# Altium PCB PCB_Class.PcbDoc
Units mil, origin at the board's own origin, x right, y up, seen from the top; angles counter-clockwise.
Board outline 2362.2 x 2677.17 mil, 2 copper layers (Top Layer, Bottom Layer), stack 57.918 mil thick; 54 components, 39 nets, 178 pads, 24 vias.
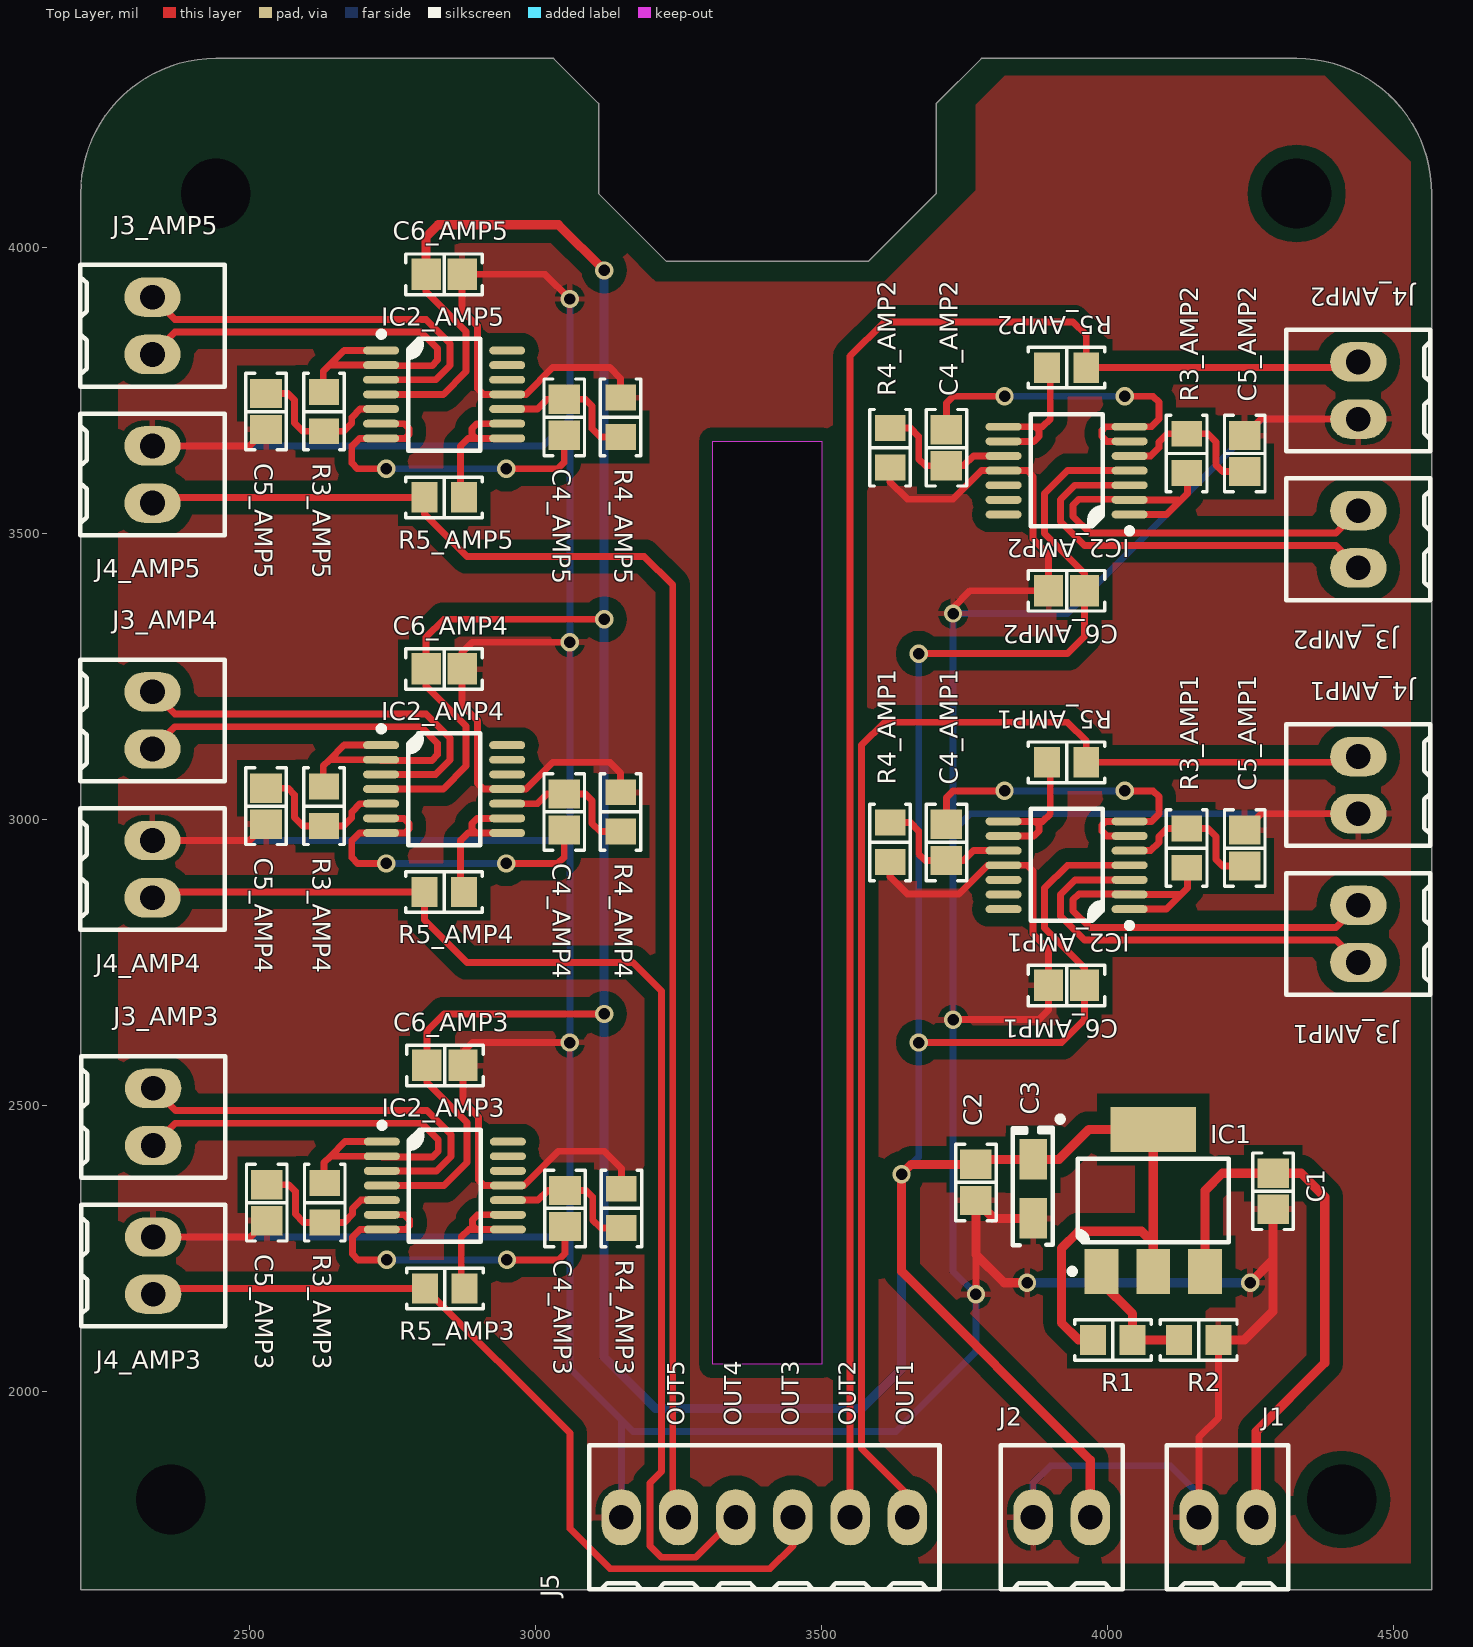
[diagram p0: Top Layer view]
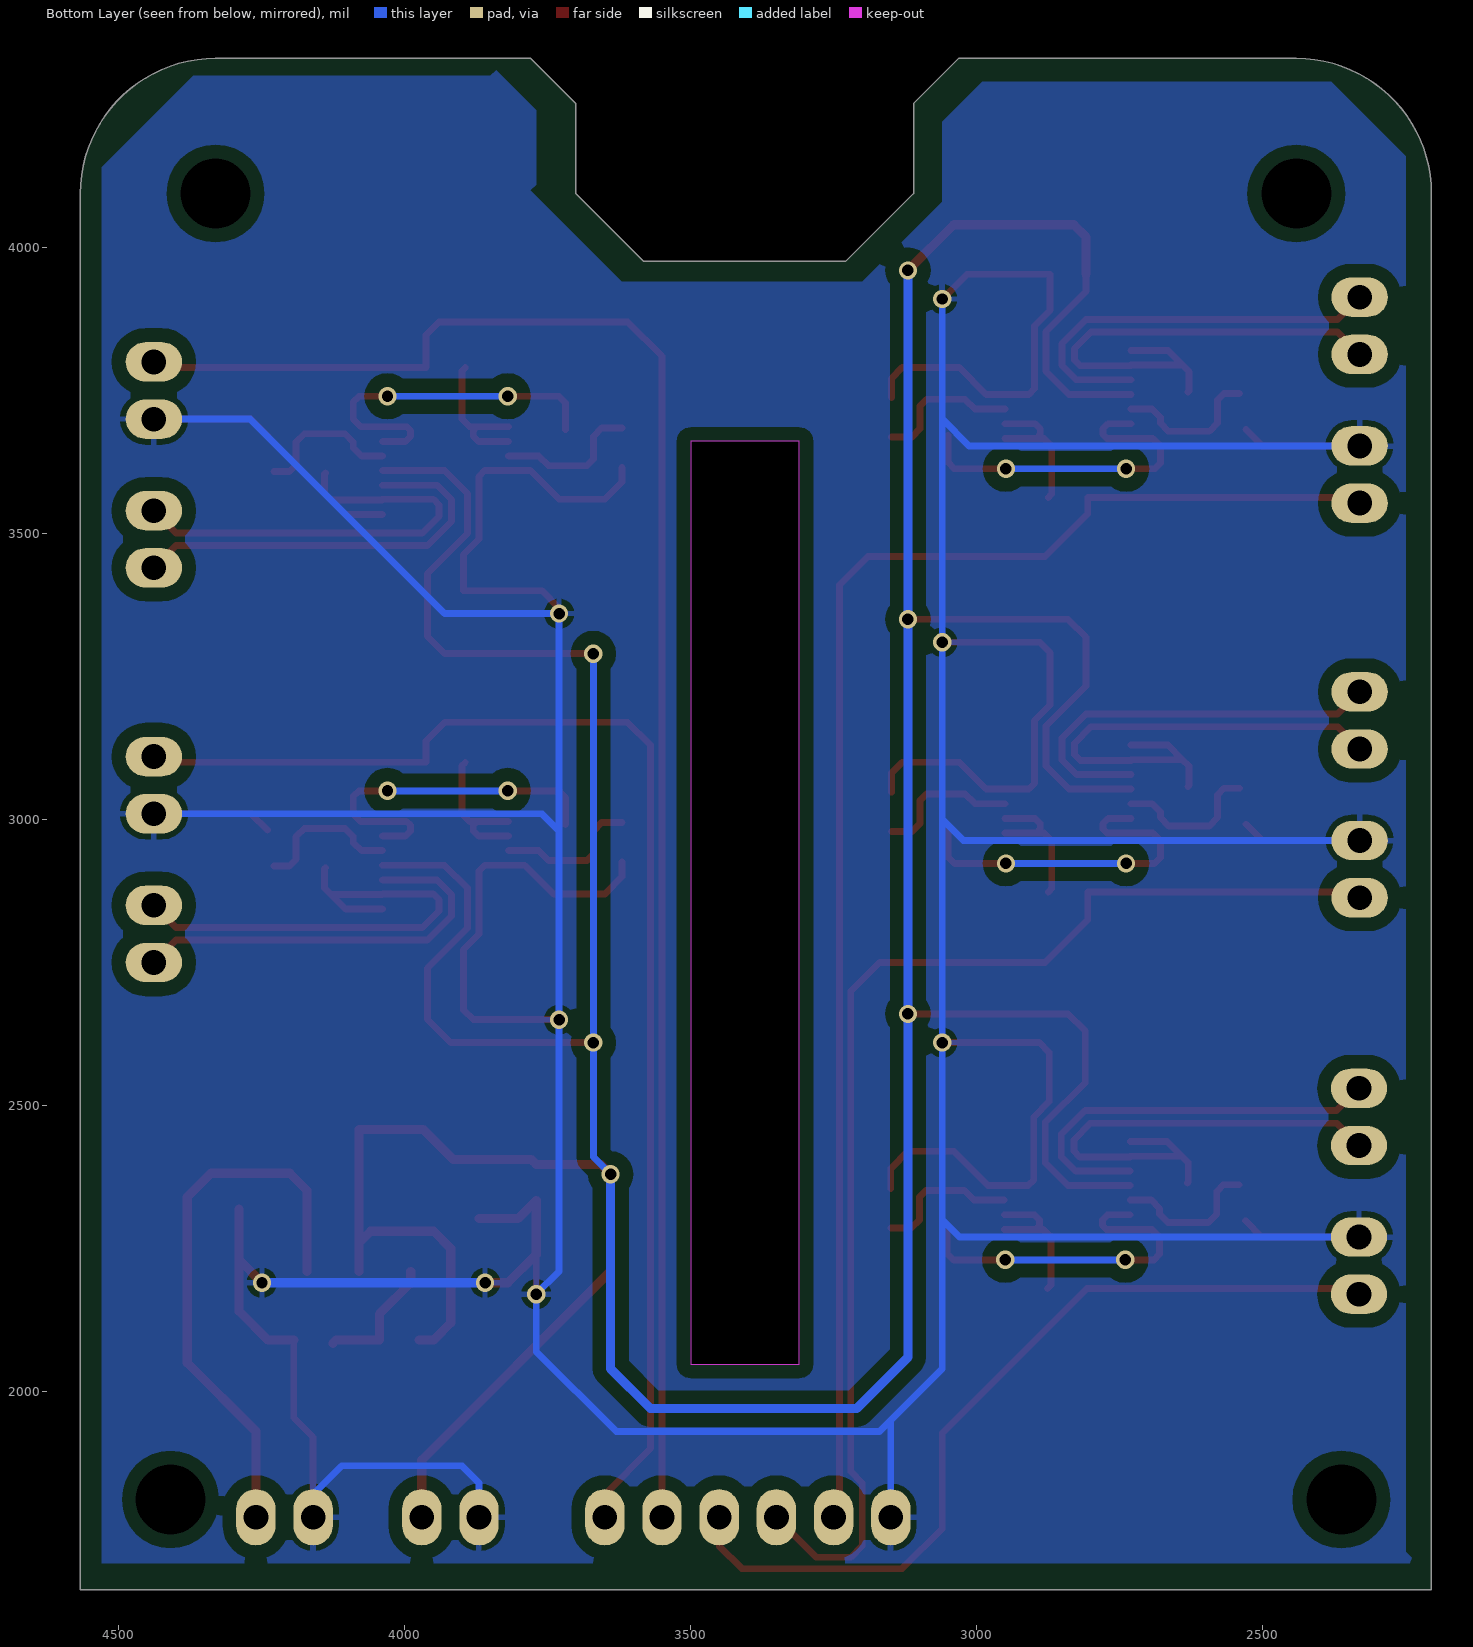
[diagram p1: Bottom Layer view, seen from below]
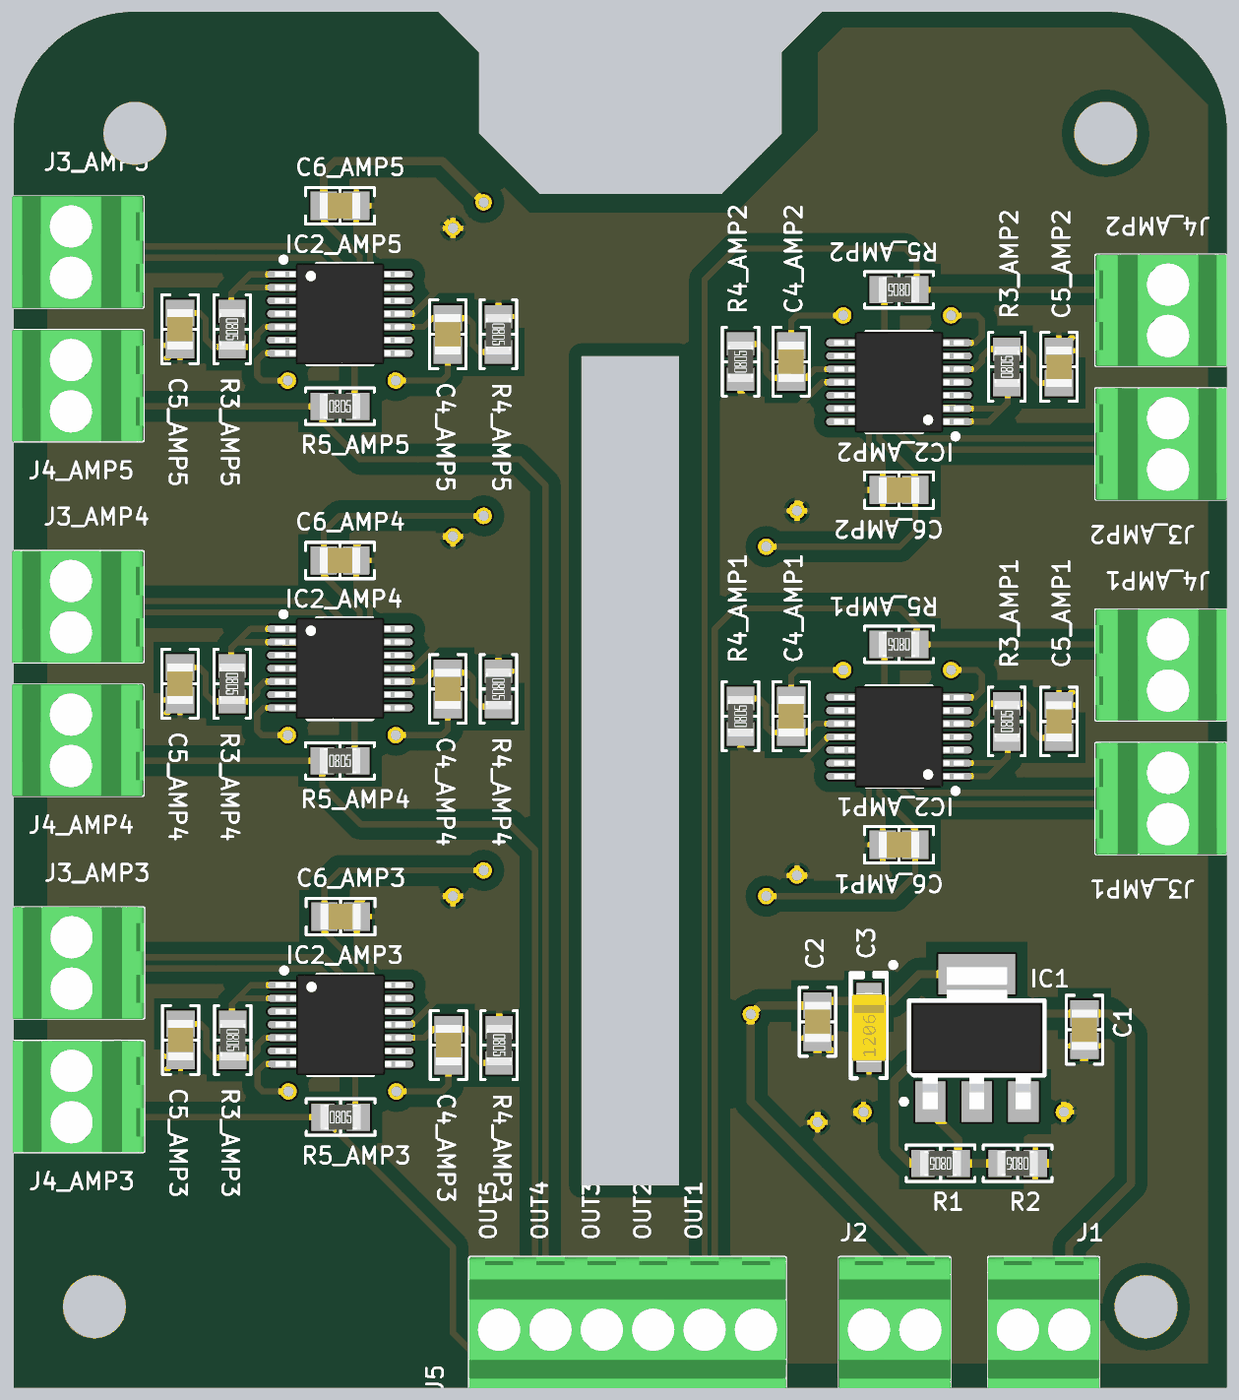
[diagram p2: 3D render of the assembled board from above, using the file's embedded part models]

## Layer stack, top to bottom
Top Solder: solder mask 0.4, Solder Resist, Dk 3.5
Top Layer: signal copper 1.4
Dielectric 1: dielectric 55.1181, FR-4, Dk 4.8
Bottom Layer: signal copper 1.4
Bottom Solder: solder mask 0.4, Solder Resist, Dk 3.5

## Board outline
2204.72,1653.54 2204.72,4094.49 cw(c2440.94,4094.49) 2440.94,4330.71 3031.5,4330.71 3110.24,4251.97 3110.24,4094.49 3228.35,3976.38 3582.68,3976.38 3700.79,4094.49 3700.79,4251.97 3779.53,4330.71 4330.71,4330.71 cw(c4330.71,4094.49) 4566.93,4094.49 4566.93,1653.54
cut-out: 3310,3661.42 3500,3661.42 3500,2047.24 3310,2047.24

## Design rules (kind name [scope] priority, off if disabled: settings)
Clearance Clearance_2 [InNamedPolygon('GND')] p1: gap=24
Clearance Clearance_1 [InNetClass('Diff_Pair') vs InNet('GND')] p2: gap=12
Clearance [All] p3: gap=6
DiffPairsRouting [All] p1: maxlimit=10 minlimit=10 mostfreqgap=10 toplayer_minwidth=10 toplayer_maxwidth=18 toplayer_prefwidth=12 bottomlayer_minwidth=10 bottomlayer_maxwidth=18 bottomlayer_prefwidth=12 maxuncoupledlength=500
PlaneClearance [All] p1: clearance=40
PolygonConnect [All] p1: connectstyle=Relief reliefconductorwidth=10 reliefentries=4 polygonreliefangle="90 Angle" airgapwidth=10
RoomDefinition REGULATORS [InComponentClass('REGULATORS')] p1: confinementstyle=ConfineIn formatcopy=TRUE lockcomponents=FALSE outline 3709.45,1970 4399.45,1970 4399.45,2550 3709.45,2550
RoomDefinition CONNECTORS [InComponentClass('CONNECTORS')] p2: confinementstyle=ConfineIn formatcopy=TRUE lockcomponents=FALSE outline 3770,1610 4360,1610 4360,1970 3770,1970
RoomDefinition AMP5 [InComponentClass('AMP5')] p3: confinementstyle=ConfineIn formatcopy=TRUE lockcomponents=FALSE outline 2175.22,3383.23 3220.22,3383.23 3220.22,4073.23 2175.22,4073.23
RoomDefinition AMP4 [InComponentClass('AMP4')] p4: confinementstyle=ConfineIn formatcopy=TRUE lockcomponents=FALSE outline 2175.22,2693.23 3220.22,2693.23 3220.22,3383.23 2175.22,3383.23
RoomDefinition AMP3 [InComponentClass('AMP3')] p5: confinementstyle=ConfineIn formatcopy=TRUE lockcomponents=FALSE outline 2176.5,2000 3221.5,2000 3221.5,2690 2176.5,2690
RoomDefinition AMP2 [InComponentClass('AMP2')] p6: confinementstyle=ConfineIn formatcopy=TRUE lockcomponents=FALSE outline 4593.5,3970 3548.5,3970 3548.5,3280 4593.5,3280
RoomDefinition AMP1 [InComponentClass('AMP1')] p7: confinementstyle=ConfineIn formatcopy=TRUE lockcomponents=FALSE outline 4593.5,3280 3548.5,3280 3548.5,2590 4593.5,2590
RoomDefinition 0-Hierarchy [InComponentClass('0-Hierarchy')] p8: confinementstyle=ConfineIn formatcopy=TRUE lockcomponents=FALSE outline 3760,1620 3760,1980 3010,1980 3010,1620
RoutingVias [All] p1: holewidth=24 width=36 viastyle="Through Hole" minholewidth=18 minwidth=30 maxholewidth=32 maxwidth=50
SolderMaskExpansion [All] p1: expansion=4
Width [All] p1: maxlimit=40 minlimit=6 preferedwidth=10
28 further rules are at their usual default settings.

## Classes and differential pairs
channel class 2-Amplifier: AMP1 AMP2 AMP3 AMP4 AMP5
net class OUT[1..5]: OUT1 OUT2 OUT3 OUT4 OUT5
component class REGULATORS: C1 C2 C3 IC1 R1 R2
component class CONNECTORS: J1 J2
component class AMP5: C4_AMP5 C5_AMP5 C6_AMP5 IC2_AMP5 J3_AMP5 J4_AMP5 R3_AMP5 R4_AMP5 R5_AMP5
component class AMP4: C4_AMP4 C5_AMP4 C6_AMP4 IC2_AMP4 J3_AMP4 J4_AMP4 R3_AMP4 R4_AMP4 R5_AMP4
component class AMP3: C4_AMP3 C5_AMP3 C6_AMP3 IC2_AMP3 J3_AMP3 J4_AMP3 R3_AMP3 R4_AMP3 R5_AMP3
component class AMP2: C4_AMP2 C5_AMP2 C6_AMP2 IC2_AMP2 J3_AMP2 J4_AMP2 R3_AMP2 R4_AMP2 R5_AMP2
component class AMP1: C4_AMP1 C5_AMP1 C6_AMP1 IC2_AMP1 J3_AMP1 J4_AMP1 R3_AMP1 R4_AMP1 R5_AMP1
component class 0-Hierarchy: J5
differential pair S_IN_AMP5: +S_IN_AMP5_P -S_IN_AMP5_N
differential pair S_IN_AMP4: +S_IN_AMP4_P -S_IN_AMP4_N
differential pair S_IN_AMP3: +S_IN_AMP3_P -S_IN_AMP3_N
differential pair S_IN_AMP2: +S_IN_AMP2_P -S_IN_AMP2_N
differential pair S_IN_AMP1: +S_IN_AMP1_P -S_IN_AMP1_N

## Components (designator, comment, footprint, x,y, rotation, side; value= is the part's Value field where it differs from the comment)
C1 "0.1uF" "CAP 0805_2012" 4289.45,2350 r90 top
C2 "0.1uF" "CAP 0805_2012" 3770,2365.51 r90 top
C3 "10µF" "CAP POL 1206_3216" 3870,2354.02 r270 top
C4_AMP1 "0.1uF" "CAP 0805_2012" 3718.5,2960 r90 top (schematic designator C4)
C4_AMP2 "0.1uF" "CAP 0805_2012" 3718.5,3650 r90 top (schematic designator C4)
C4_AMP3 "0.1uF" "CAP 0805_2012" 3051.5,2320 r270 top (schematic designator C4)
C4_AMP4 "0.1uF" "CAP 0805_2012" 3050.22,3013.23 r270 top (schematic designator C4)
C4_AMP5 "0.1uF" "CAP 0805_2012" 3050.22,3703.23 r270 top (schematic designator C4)
C5_AMP1 "0.1uF" "CAP 0805_2012" 4240,2950 r270 top (schematic designator C5)
C5_AMP2 "0.1uF" "CAP 0805_2012" 4240,3640 r270 top (schematic designator C5)
C5_AMP3 "0.1uF" "CAP 0805_2012" 2530,2330 r90 top (schematic designator C5)
C5_AMP4 "0.1uF" "CAP 0805_2012" 2528.72,3023.23 r90 top (schematic designator C5)
C5_AMP5 "0.1uF" "CAP 0805_2012" 2528.72,3713.23 r90 top (schematic designator C5)
C6_AMP1 "0.1uF" "CAP 0805_2012" 3928.5,2710 r0 top (schematic designator C6)
C6_AMP2 "0.1uF" "CAP 0805_2012" 3928.5,3400 r0 top (schematic designator C6)
C6_AMP3 "0.1uF" "CAP 0805_2012" 2841.5,2570 r180 top (schematic designator C6)
C6_AMP4 "0.1uF" "CAP 0805_2012" 2840.22,3263.23 r180 top (schematic designator C6)
C6_AMP5 "0.1uF" "CAP 0805_2012" 2840.22,3953.23 r180 top (schematic designator C6)
IC1 "#NAME?" "TI SOT-223 DCY" 4080,2334.02 r90 top
IC2_AMP1 "#NAME?" "TI TSSOP-14 PW" 3928.5,2920 r180 top (schematic designator IC2)
IC2_AMP2 "#NAME?" "TI TSSOP-14 PW" 3928.5,3610 r180 top (schematic designator IC2)
IC2_AMP3 "#NAME?" "TI TSSOP-14 PW" 2841.5,2360 r0 top (schematic designator IC2)
IC2_AMP4 "#NAME?" "TI TSSOP-14 PW" 2840.22,3053.23 r0 top (schematic designator IC2)
IC2_AMP5 "#NAME?" "TI TSSOP-14 PW" 2840.22,3743.23 r0 top (schematic designator IC2)
J1 "#NAME?" "TE 282834-2" 4210,1780 r180 top
J2 "#NAME?" "TE 282834-2" 3920,1780 r180 top
J3_AMP1 "#NAME?" "TE 282834-2" 4438.5,2800 r270 top (schematic designator J3)
J3_AMP2 "#NAME?" "TE 282834-2" 4438.5,3490 r270 top (schematic designator J3)
J3_AMP3 "#NAME?" "TE 282834-2" 2331.5,2480 r90 top (schematic designator J3)
J3_AMP4 "#NAME?" "TE 282834-2" 2330.22,3173.23 r90 top (schematic designator J3)
J3_AMP5 "#NAME?" "TE 282834-2" 2330.22,3863.23 r90 top (schematic designator J3)
J4_AMP1 "#NAME?" "TE 282834-2" 4438.5,3060 r270 top (schematic designator J4)
J4_AMP2 "#NAME?" "TE 282834-2" 4438.5,3750 r270 top (schematic designator J4)
J4_AMP3 "#NAME?" "TE 282834-2" 2331.5,2220 r90 top (schematic designator J4)
J4_AMP4 "#NAME?" "TE 282834-2" 2330.22,2913.23 r90 top (schematic designator J4)
J4_AMP5 "#NAME?" "TE 282834-2" 2330.22,3603.23 r90 top (schematic designator J4)
J5 "282834-6" "TE 282834-6" 3400,1780 r180 top
R1 "330 R" "RES 0805_2012" 4009.45,2090 r180 top
R2 "330 R" "RES 0805_2012" 4159.45,2090 r180 top
R3_AMP1 "330 R" "RES 0805_2012" 4138.5,2950 r90 top (schematic designator R3)
R3_AMP2 "330 R" "RES 0805_2012" 4138.5,3640 r90 top (schematic designator R3)
R3_AMP3 "330 R" "RES 0805_2012" 2631.5,2330 r270 top (schematic designator R3)
R3_AMP4 "330 R" "RES 0805_2012" 2630.22,3023.23 r270 top (schematic designator R3)
R3_AMP5 "330 R" "RES 0805_2012" 2630.22,3713.23 r270 top (schematic designator R3)
R4_AMP1 "330 R" "RES 0805_2012" 3620,2960 r90 top (schematic designator R4)
R4_AMP2 "330 R" "RES 0805_2012" 3620,3650 r90 top (schematic designator R4)
R4_AMP3 "330 R" "RES 0805_2012" 3150,2320 r270 top (schematic designator R4)
R4_AMP4 "330 R" "RES 0805_2012" 3148.72,3013.23 r270 top (schematic designator R4)
R4_AMP5 "330 R" "RES 0805_2012" 3148.72,3703.23 r270 top (schematic designator R4)
R5_AMP1 "0 R" "RES 0805_2012" 3928.5,3100 r180 top (schematic designator R5)
R5_AMP2 "0 R" "RES 0805_2012" 3928.5,3790 r180 top (schematic designator R5)
R5_AMP3 "0 R" "RES 0805_2012" 2841.5,2180 r0 top (schematic designator R5)
R5_AMP4 "0 R" "RES 0805_2012" 2840.22,2873.23 r0 top (schematic designator R5)
R5_AMP5 "0 R" "RES 0805_2012" 2840.22,3563.23 r0 top (schematic designator R5)

## Footprints (in the part's own frame and the unit in brackets; to place one, negate y for a bottom-side part, rotate by r counter-clockwise, add the part's x,y. Pads: shape width x height; smd on the part's side, far side on the other; paste and mask are expansions set on the pad)
"CAP 0805_2012" [mm] "Chip Capacitor, 2-Leads, Body 2.00x1.20mm, IPC Medium Density"
  rect 1.3x1.4 smd: 1(-0.8,0) 2(0.8,0)
  silkscreen extent -1.7,-0.9 1.7,0.9, body extent -1,-0.64 1,0.64, height 1.26
"CAP POL 1206_3216" [mm] "Molded Capacitor, 2-Leads, Body 3.20x1.6mm, IPC Medium Density"
  rect 1.8x1.23 smd: 1(-1.31,0) 2(1.31,0)
  silkscreen extent -3.22,-0.9 2.5,1.33, body extent -1.72,-0.85 1.71,0.85, height 1.7
"RES 0805_2012" [mm] "Chip Resistor, 2-Leads, Body 2.00x1.25mm, IPC Medium Density"
  rect 1.15x1.35 smd: 1(-0.875,0) 2(0.875,0)
  silkscreen extent -1.7,-0.9 1.7,0.9, body extent -1,-0.62 1,0.63, height 0.6
"TE 282834-2" [mm]
  oval 1.75x2.5 hole 1.1: 1(-1.27,0) 2(1.27,0)
  silkscreen extent -2.7,-3.2 2.7,3.2, body extent -2.77,-3.25 2.77,3.25, height 10
"TE 282834-6" [mm]
  oval 1.75x2.5 hole 1.1: 1(-6.35,0) 2(-3.81,0) 3(-1.27,0) 4(1.27,0) 5(3.81,0) 6(6.35,0)
  silkscreen extent -7.78,-3.2 7.78,3.2, body extent -7.85,-3.25 7.85,3.25, height 10
"TI SOT-223 DCY" [mm] "SOT223, 4-Leads, Body 6.50x7.00mm (avg), Pitch 2.30mm, IPC Medium Density"
  rect 2x1.5 smd: 1(-3.15,2.3) 2(-3.15,0) 3(-3.15,-2.3)
  rect 2x3.8 smd: 4(3.15,0)
  silkscreen extent -3.27,-3.35 1.85,3.72, body extent -3.52,-3.25 3.5,3.25, height 1.8
"TI TSSOP-14 PW" [mm] "TSSOP, 14-Leads, Body 5.00x4.40mm, Pitch 0.65mm, IPC Medium Density"
  oval 1.6x0.35 smd: 1(-2.8,1.95) 2(-2.8,1.3) 3(-2.8,0.65) 4(-2.8,0) 5(-2.8,-0.65) 6(-2.8,-1.3) 7(-2.8,-1.95) 8(2.8,-1.95) 9(2.8,-1.3) 10(2.8,-0.65) 11(2.8,0) 12(2.8,0.65) 13(2.8,1.3) 14(2.8,1.95)
  silkscreen extent -2.92,-2.5 1.6,2.8, body extent -3.21,-2.5 3.21,2.5, height 1.2

## Part data
C1 C2 C4_AMP1 C4_AMP2 C4_AMP3 C4_AMP4 C4_AMP5 C5_AMP1 C5_AMP2 C5_AMP3 C5_AMP4 C5_AMP5 C6_AMP1 C6_AMP2 C6_AMP3 C6_AMP4 C6_AMP5: library part CBR08C569BCGAC, "CAP CER 5.6PF 500V C0G/NP0 0805"
C3: library part TR3A336K6R3C0600, "CAP TANT 33UF 10% 6.3V 1206"
IC1: library part LM317DCYR, "IC REG LIN POS ADJ 1.5A SOT223-4"
IC2_AMP1 IC2_AMP2 IC2_AMP3 IC2_AMP4 IC2_AMP5: library part LMV824AIPT, "IC OPAMP GP 4 CIRCUIT 14TSSOP"
J1 J2 J3_AMP1 J3_AMP2 J3_AMP3 J3_AMP4 J3_AMP5 J4_AMP1 J4_AMP2 J4_AMP3 J4_AMP4 J4_AMP5: library part 282834-2, "TERM BLK 2P SIDE ENT 2.54MM PCB"
J5: "TERM BLK 6P SIDE ENT 2.54MM PCB"
R1 R2 R3_AMP1 R3_AMP2 R3_AMP3 R3_AMP4 R3_AMP5 R4_AMP1 R4_AMP2 R4_AMP3 R4_AMP4 R4_AMP5 R5_AMP1 R5_AMP2 R5_AMP3 R5_AMP4 R5_AMP5: library part RNCF0805DTE82K0, "RES 82K OHM 0.5% 1/8W 0805"

## Free pads (board coordinates)
  rect 17.72x57.09 hole 122.05: 0(2440.94,4094.49) 1(4330.71,4094.49) 2(2362.2,1811.02) 3(4409.45,1811.02)

## Via types
v1: diameter 32, hole 20, Top Layer to Bottom Layer, 24 vias

## Nets (pads, with @x,y where several pads share a name; then routed paths per layer and width w, separated by ;. In a path a pad name is that pad's centre, name@x,y a point inside that pad or via, vN(x,y) a via of type N, cw(c..) or ccw(c..) an arc to the next point about the centre after c; other vN are vias at no path point)
5V: C2.2 C3.1 C6_AMP1.2 C6_AMP2.2 C6_AMP3.2 C6_AMP4.2 C6_AMP5.2 IC1.2 IC1.4 IC2_AMP1.4 IC2_AMP2.4 IC2_AMP3.4 IC2_AMP4.4 IC2_AMP5.4 J2.1 R1.2 | length 9336.5
  Top Layer w12: IC2_AMP4.4 2838.72,3053.23 2878.72,3093.23 2878.72,3163.23 2808.72,3233.23 C6_AMP4.2 2808.72,3318.72 2840,3350 v1(3120,3350) ; IC2_AMP5.4 2838.72,3743.23 2878.72,3783.23 2878.72,3853.23 2808.72,3923.23 C6_AMP5.2 ; IC2_AMP3.4 2840,2360 2880,2400 2880,2470 2810,2540 C6_AMP3.2 2810,2630 2840,2660 v1(3120,2660) ; v1(3670,2610) 3920,2610 3960,2650 C6_AMP1.2 3960,2740 3890,2810 3890,2880 3930,2920 IC2_AMP1.4 ; v1(3670,3290) 3930,3290 3960,3320 C6_AMP2.2 3960,3430 3890,3500 3890,3570 3930,3610 IC2_AMP2.4
  Top Layer w16: C6_AMP5.2 2808.72,4018.72 2830,4040 3040,4040 v1(3120,3960) ; J2.1 3970,1880 3640,2210 v1(3640,2380) 3657.01,2397.01 C2.2 3778.58,2405.59 C3.1 3915.04,2405.59 3967.48,2458.03 IC1.4 4080,2259.45 ; R1.2 3949.45,2090 3919.45,2120 3919.45,2250 3949.45,2280 4059.45,2280 4080,2259.45 ; IC1.2 4080,2259.45
  Bottom Layer w12: v1(3640,2380) 3670,2410 v1(3670,2610) v1(3670,3290)
  Bottom Layer w16: v1(3120,3960) v1(3120,3350) v1(3120,2660) 3120,2060 3210,1970 3570,1970 3640,2040 v1(3640,2380)
12V: C1.2 IC1.3 J1.1 | length 990
  Top Layer w16: IC1.3 4170.55,2351.1 4200.94,2381.5 C1.2 4338.5,2381.5 4380,2340 4380,2050 4260,1930 J1.1
GND: C1.1 C2.1 C3.2 C5_AMP1.1 C5_AMP2.1 C5_AMP3.1 C5_AMP4.1 C5_AMP5.1 C6_AMP1.1 C6_AMP2.1 C6_AMP3.1 C6_AMP4.1 C6_AMP5.1 IC2_AMP1.11 IC2_AMP2.11 IC2_AMP3.11 IC2_AMP4.11 IC2_AMP5.11 J1.2 J2.2 J4_AMP1.2 J4_AMP2.2 J4_AMP3.2 J4_AMP4.2 J4_AMP5.2 J5.6 R2.1 R4_AMP1.1 R4_AMP2.1 R4_AMP3.1 R4_AMP4.1 R4_AMP5.1 | length 14585
  Top Layer w12: J4_AMP4.2 2500.22,2963.23 C5_AMP4.1 ; J4_AMP5.2 2500.22,3653.23 C5_AMP5.1 ; J4_AMP3.2 2501.5,2270 C5_AMP3.1 ; v1(3060,2610) 2890,2610 2872.99,2592.99 C6_AMP3.1 2872.99,2507.01 2900,2480 2900,2370 2910,2360 IC2_AMP3.11 2980,2360 3040,2420 3120,2420 3150,2390 R4_AMP3.1 ; v1(3060,3310) 2890,3310 2871.72,3291.72 C6_AMP4.1 2871.72,3200.24 2898.72,3173.23 2898.72,3063.23 2908.73,3053.23 IC2_AMP4.11 2983.23,3053.23 3030,3100 3130,3100 3148.72,3081.28 R4_AMP4.1 ; v1(3060,3910) 3016.77,3953.23 C6_AMP5.1 2871.72,3890.24 2898.72,3863.23 2898.72,3753.23 2908.73,3743.23 IC2_AMP5.11 2983.23,3743.23 3030,3790 3130,3790 3148.72,3771.28 R4_AMP5.1 ; R4_AMP1.1 3620,2900 3650,2870 3740,2870 3790,2920 IC2_AMP1.11 3860,2920 3870,2910 3870,2800 3897.01,2772.99 C6_AMP1.1 3897.01,2667.01 3880,2650 v1(3730,2650) ; R4_AMP2.1 3620,3590 3650,3560 3730.12,3560 3758.06,3587.94 3758.06,3588.06 3780,3610 IC2_AMP2.11 3860,3610 3870,3600 3870,3490 3897.01,3462.99 C6_AMP2.1 3760,3400 3730,3370 v1(3730,3360) ; v1(3770,2170) 3770,2239.45 ; J1.2 4160,1920 4193.9,1953.9 R2.1 ; C5_AMP1.1 4268.5,3010 J4_AMP1.2 ; C5_AMP2.1 4268.5,3700 J4_AMP2.2
  Top Layer w16: v1(3859.45,2190) 3819.45,2190 3770,2239.45 C2.1 3801.57,2302.44 C3.2 ; R2.1 4239.45,2090 4289.45,2140 4289.45,2230 ; v1(4249.45,2190) 4289.45,2230 ; C1.1 4289.45,2230
  Bottom Layer w12: J4_AMP4.2 3023.23,2963.23 3060,3000 ; J4_AMP5.2 3013.23,3653.23 3060,3700 ; J4_AMP3.2 3030,2270 3060,2300 ; v1(3060,3910) 3060,3700 ; J5.6 3150,1950 ; J2.2 3870,1840 3900,1870 4110,1870 4160,1820 J1.2 ; J4_AMP1.2 3760,3010 3730,2980 ; J4_AMP2.2 4270,3700 3930,3360 v1(3730,3360) 3730,2980 ; 3060,2300 v1(3060,2610) 3060,3000 ; 3060,2300 3060,2040 3150,1950 ; 3060,3000 v1(3060,3310) 3060,3700 ; 3150,1950 3170,1930 3630,1930 3770,2070 v1(3770,2170) 3730,2210 v1(3730,2650) 3730,2980
  Bottom Layer w16: v1(3859.45,2190) v1(4249.45,2190)
NetC4_AMP1_1: C4_AMP1.1 IC2_AMP1.10 R4_AMP1.2 | length 256.1
  Top Layer w12: R4_AMP1.2 3655.55,2994.45 3670,2980 3670,2940 3681.5,2928.5 C4_AMP1.1 3748.5,2928.5 3765.59,2945.59 IC2_AMP1.10
NetC4_AMP1_2: C4_AMP1.2 IC2_AMP1.6 IC2_AMP1.7 | length 628.1
  Top Layer w12: C4_AMP1.2 3718.5,3038.5 3730,3050 v1(3820,3050) ; v1(4030,3050) 4080,3050 4090,3040 4090,3010 4076.77,2996.77 IC2_AMP1.7 3996.77,2996.77 3990,2990 3990,2980 3998.82,2971.18 IC2_AMP1.6
  Bottom Layer w12: v1(3820,3050) v1(4030,3050)
NetC4_AMP2_1: C4_AMP2.1 IC2_AMP2.10 R4_AMP2.2 | length 256.1
  Top Layer w12: R4_AMP2.2 3655.55,3684.45 3670,3670 3670,3630 3681.5,3618.5 C4_AMP2.1 3748.5,3618.5 3765.59,3635.59 IC2_AMP2.10
NetC4_AMP2_2: C4_AMP2.2 IC2_AMP2.6 IC2_AMP2.7 | length 628.1
  Top Layer w12: C4_AMP2.2 3718.5,3728.5 3730,3740 v1(3820,3740) ; v1(4030,3740) 4080,3740 4090,3730 4090,3700 4076.77,3686.77 IC2_AMP2.7 3996.77,3686.77 3990,3680 3990,3670 3998.82,3661.18 IC2_AMP2.6
  Bottom Layer w12: v1(3820,3740) v1(4030,3740)
NetC4_AMP3_1: C4_AMP3.1 IC2_AMP3.10 R4_AMP3.2 | length 256.1
  Top Layer w12: IC2_AMP3.10 3004.41,2334.41 3021.5,2351.5 C4_AMP3.1 3088.5,2351.5 3100,2340 3100,2300 3114.45,2285.55 R4_AMP3.2
NetC4_AMP3_2: C4_AMP3.2 IC2_AMP3.6 IC2_AMP3.7 | length 628.1
  Top Layer w12: IC2_AMP3.6 2771.18,2308.82 2780,2300 2780,2290 2773.23,2283.23 IC2_AMP3.7 2693.23,2283.23 2680,2270 2680,2240 2690,2230 v1(2740,2230) ; v1(2950,2230) 3040,2230 3051.5,2241.5 C4_AMP3.2
  Bottom Layer w12: v1(2740,2230) v1(2950,2230)
NetC4_AMP4_1: C4_AMP4.1 IC2_AMP4.10 R4_AMP4.2 | length 256.1
  Top Layer w12: IC2_AMP4.10 3003.13,3027.64 3020.22,3044.73 C4_AMP4.1 3087.23,3044.73 3098.72,3033.23 3098.72,2993.23 3113.17,2978.78 R4_AMP4.2
NetC4_AMP4_2: C4_AMP4.2 IC2_AMP4.6 IC2_AMP4.7 | length 628.1
  Top Layer w12: IC2_AMP4.6 2769.91,3002.05 2778.72,2993.23 2778.72,2983.23 2771.95,2976.46 IC2_AMP4.7 2691.95,2976.46 2678.72,2963.23 2678.72,2933.23 2688.72,2923.23 v1(2738.72,2923.23) ; v1(2948.72,2923.23) 3038.72,2923.23 3050.22,2934.73 C4_AMP4.2
  Bottom Layer w12: v1(2738.72,2923.23) v1(2948.72,2923.23)
NetC4_AMP5_1: C4_AMP5.1 IC2_AMP5.10 R4_AMP5.2 | length 256.1
  Top Layer w12: IC2_AMP5.10 3003.13,3717.64 3020.22,3734.73 C4_AMP5.1 3087.23,3734.73 3098.72,3723.23 3098.72,3683.23 3113.17,3668.78 R4_AMP5.2
NetC4_AMP5_2: C4_AMP5.2 IC2_AMP5.6 IC2_AMP5.7 | length 628.1
  Top Layer w12: IC2_AMP5.6 2769.91,3692.05 2778.72,3683.23 2778.72,3673.23 2771.95,3666.46 IC2_AMP5.7 2691.95,3666.46 2678.72,3653.23 2678.72,3623.23 2688.72,3613.23 v1(2738.72,3613.23) ; v1(2948.72,3613.23) 3038.72,3613.23 3050.22,3624.73 C4_AMP5.2
  Bottom Layer w12: v1(2738.72,3613.23) v1(2948.72,3613.23)
NetC5_AMP1_2: C5_AMP1.2 IC2_AMP1.5 R3_AMP1.2 | length 262.5
  Top Layer w12: IC2_AMP1.5 4075.59,2945.59 4090,2960 4090,2970 4104.45,2984.45 R3_AMP1.2 4175.55,2984.45 4190,2970 4190,2930 4201.5,2918.5 C5_AMP1.2@4228.5,2918.5
NetC5_AMP2_2: C5_AMP2.2 IC2_AMP2.5 R3_AMP2.2 | length 262.5
  Top Layer w12: IC2_AMP2.5 4075.59,3635.59 4090,3650 4090,3660 4104.45,3674.45 R3_AMP2.2 4175.55,3674.45 4190,3660 4190,3620 4201.5,3608.5 C5_AMP2.2@4228.5,3608.5
NetC5_AMP3_2: C5_AMP3.2 IC2_AMP3.5 R3_AMP3.2 | length 262.5
  Top Layer w12: C5_AMP3.2@2541.5,2361.5 2568.5,2361.5 2580,2350 2580,2310 2594.45,2295.55 R3_AMP3.2 2665.55,2295.55 2680,2310 2680,2320 2694.41,2334.41 IC2_AMP3.5
NetC5_AMP4_2: C5_AMP4.2 IC2_AMP4.5 R3_AMP4.2 | length 262.5
  Top Layer w12: C5_AMP4.2@2540.22,3054.73 2567.23,3054.73 2578.72,3043.23 2578.72,3003.23 2593.17,2988.78 R3_AMP4.2 2664.28,2988.78 2678.72,3003.23 2678.72,3013.23 2693.13,3027.64 IC2_AMP4.5
NetC5_AMP5_2: C5_AMP5.2 IC2_AMP5.5 R3_AMP5.2 | length 262.5
  Top Layer w12: C5_AMP5.2@2540.22,3744.73 2567.23,3744.73 2578.72,3733.23 2578.72,3693.23 2593.17,3678.78 R3_AMP5.2 2664.28,3678.78 2678.72,3693.23 2678.72,3703.23 2693.13,3717.64 IC2_AMP5.5
NetIC1_1: IC1.1 R1.1 R2.2 | length 226.7
  Top Layer w16: IC1.1 3989.45,2190 4043.9,2135.55 R1.1 4119.57,2090 R2.2@4125.55,2084.02
NetIC2_AMP1_8: IC2_AMP1.8 IC2_AMP1.9 R5_AMP1.2 | length 264.7
  Top Layer w12: IC2_AMP1.9 3871.18,2971.18 3880,2980 3880,2990 3873.23,2996.77 ; IC2_AMP1.8 3873.23,2996.77 ; R5_AMP1.2 3900,3094.06 3900,3010 3886.77,2996.77 3873.23,2996.77
NetIC2_AMP2_8: IC2_AMP2.8 IC2_AMP2.9 R5_AMP2.2 | length 264.7
  Top Layer w12: IC2_AMP2.9 3871.18,3661.18 3880,3670 3880,3680 3873.23,3686.77 ; IC2_AMP2.8 3873.23,3686.77 ; R5_AMP2.2 3900,3784.06 3900,3700 3886.77,3686.77 3873.23,3686.77
NetIC2_AMP3_8: IC2_AMP3.8 IC2_AMP3.9 R5_AMP3.2 | length 264.7
  Top Layer w12: R5_AMP3.2 2870,2185.94 2870,2270 2883.23,2283.23 2896.77,2283.23 ; IC2_AMP3.8 2896.77,2283.23 ; IC2_AMP3.9 2898.82,2308.82 2890,2300 2890,2290 2896.77,2283.23
NetIC2_AMP4_8: IC2_AMP4.8 IC2_AMP4.9 R5_AMP4.2 | length 264.7
  Top Layer w12: R5_AMP4.2 2868.72,2879.17 2868.72,2963.23 2881.95,2976.46 2895.5,2976.46 ; IC2_AMP4.8 2895.5,2976.46 ; IC2_AMP4.9 2897.54,3002.05 2888.72,2993.23 2888.72,2983.23 2895.5,2976.46
NetIC2_AMP5_8: IC2_AMP5.8 IC2_AMP5.9 R5_AMP5.2 | length 264.7
  Top Layer w12: R5_AMP5.2 2868.72,3569.17 2868.72,3653.23 2881.95,3666.46 2895.5,3666.46 ; IC2_AMP5.8 2895.5,3666.46 ; IC2_AMP5.9 2897.54,3692.05 2888.72,3683.23 2888.72,3673.23 2895.5,3666.46
OUT1: J4_AMP1.1 J5.1 R5_AMP1.1 | length 2323
  Top Layer w12: J5.1 3650,1820 3570,1900 3570,3130 3610,3170 3930,3170 3962.95,3137.05 R5_AMP1.1 4428.5,3100 J4_AMP1.1
OUT2: J4_AMP2.1 J5.2 R5_AMP2.1 | length 3014.1
  Top Layer w12: J5.2 3550,3810 3610,3870 3940,3870 3962.95,3847.05 R5_AMP2.1 4428.5,3790 J4_AMP2.1
OUT3: J4_AMP3.1 J5.3 R5_AMP3.1 | length 1490
  Top Layer w12: J4_AMP3.1 2341.5,2180 R5_AMP3.1 3060,1927.05 3060,1760 3130,1690 3410,1690 3450,1730 J5.3
OUT4: J4_AMP4.1 J5.4 R5_AMP4.1 | length 2159.9
  Top Layer w12: J4_AMP4.1 2340.22,2873.23 R5_AMP4.1 2805.77,2824.23 2880,2750 3170,2750 3220,2700 3220,1860 3200,1840 3200,1730 3220,1710 3280,1710 J5.4
OUT5: J4_AMP5.1 J5.5 R5_AMP5.1 | length 2628.5
  Top Layer w12: J4_AMP5.1 2340.22,3563.23 R5_AMP5.1 2805.77,3534.23 2880,3460 3190,3460 3240,3410 3240,1790 J5.5
S_IN_AMP1_N: IC2_AMP1.1 IC2_AMP1.2 J3_AMP1.1 R3_AMP1.1 | length 892.3
  Top Layer w12: IC2_AMP1.1 4103.23,2843.23 4128.82,2868.82 ; IC2_AMP1.2 4128.82,2868.82 ; IC2_AMP1.2@4038.72,2870 3950,2870 3940,2860 3940,2840 3969,2811 4399.5,2811 J3_AMP1.1 ; R3_AMP1.1 4140,2914.06 4140,2880 4128.82,2868.82
S_IN_AMP1_P: IC2_AMP1.3 J3_AMP1.2 | length 723.4
  Top Layer w12: IC2_AMP1.3 3943.3,2894.41 3918,2869.11 3918,2830.89 3959.89,2789 4399.5,2789 J3_AMP1.2
S_IN_AMP2_N: IC2_AMP2.1 IC2_AMP2.2 J3_AMP2.1 R3_AMP2.1 | length 892.3
  Top Layer w12: IC2_AMP2.1 4103.23,3533.23 4128.82,3558.82 ; IC2_AMP2.2 4128.82,3558.82 ; IC2_AMP2.2@4038.72,3560 3950,3560 3940,3550 3940,3530 3969,3501 4399.5,3501 J3_AMP2.1 ; R3_AMP2.1 4140,3604.06 4140,3570 4128.82,3558.82
S_IN_AMP2_P: IC2_AMP2.3 J3_AMP2.2 | length 723.4
  Top Layer w12: IC2_AMP2.3 3943.3,3584.41 3918,3559.11 3918,3520.89 3959.89,3479 4399.5,3479 J3_AMP2.2
S_IN_AMP3_N: IC2_AMP3.1 IC2_AMP3.2 J3_AMP3.1 R3_AMP3.1 | length 892.3
  Top Layer w12: J3_AMP3.1 2370.5,2469 2801,2469 2830,2440 2830,2420 2820,2410 IC2_AMP3.2@2731.28,2410 ; R3_AMP3.1 2630,2365.94 2630,2400 2641.18,2411.18 ; IC2_AMP3.2 2641.18,2411.18 ; IC2_AMP3.1 2666.77,2436.77 2641.18,2411.18
S_IN_AMP3_P: IC2_AMP3.3 J3_AMP3.2 | length 723.4
  Top Layer w12: J3_AMP3.2 2370.5,2491 2810.11,2491 2852,2449.11 2852,2410.89 2826.7,2385.59 IC2_AMP3.3
S_IN_AMP4_N: IC2_AMP4.1 IC2_AMP4.2 J3_AMP4.1 R3_AMP4.1 | length 892.3
  Top Layer w12: J3_AMP4.1 2369.22,3162.23 2799.72,3162.23 2828.72,3133.23 2828.72,3113.23 2818.72,3103.23 IC2_AMP4.2@2730,3103.23 ; R3_AMP4.1 2628.72,3059.17 2628.72,3093.23 2639.9,3104.41 ; IC2_AMP4.2 2639.9,3104.41 ; IC2_AMP4.1 2665.49,3130 2639.9,3104.41
S_IN_AMP4_P: IC2_AMP4.3 J3_AMP4.2 | length 723.4
  Top Layer w12: J3_AMP4.2 2369.22,3184.23 2808.84,3184.23 2850.72,3142.34 2850.72,3104.12 2825.43,3078.82 IC2_AMP4.3
S_IN_AMP5_N: IC2_AMP5.1 IC2_AMP5.2 J3_AMP5.1 R3_AMP5.1 | length 892.3
  Top Layer w12: J3_AMP5.1 2369.22,3852.23 2799.72,3852.23 2828.72,3823.23 2828.72,3803.23 2818.72,3793.23 IC2_AMP5.2@2730,3793.23 ; R3_AMP5.1 2628.72,3749.17 2628.72,3783.23 2639.9,3794.41 ; IC2_AMP5.2 2639.9,3794.41 ; IC2_AMP5.1 2665.49,3820 2639.9,3794.41
S_IN_AMP5_P: IC2_AMP5.3 J3_AMP5.2 | length 723.4
  Top Layer w12: J3_AMP5.2 2369.22,3874.23 2808.84,3874.23 2850.72,3832.34 2850.72,3794.12 2825.43,3768.82 IC2_AMP5.3
pads on no net: IC2_AMP1.12 IC2_AMP1.13 IC2_AMP1.14 IC2_AMP2.12 IC2_AMP2.13 IC2_AMP2.14 IC2_AMP3.12 IC2_AMP3.13 IC2_AMP3.14 IC2_AMP4.12 IC2_AMP4.13 IC2_AMP4.14 IC2_AMP5.12 IC2_AMP5.13 IC2_AMP5.14

## Polygon pours and split planes (outlines as drawn)
GND on Top Layer "GND" (solid, remove dead copper, pour order 0): 2290,4230 2340,4280 3020,4280 3070,4230 3070,4070 3080,4070 3200,3950 3210,3940 3600,3940 3610,3940 3750,4080 3770,4100 3770,4240 3770,4250 3820,4300 4350,4300 4380,4300 4530,4150 4530,1700 2250,1700 2270,1720 2270,4210
GND on Bottom Layer "GND" (solid, remove dead copper, pour order 4): 2270,4180 2380,4290 2490,4290 2990,4290 3010,4270 3060,4220 3060,4080 3200,3940 3590,3940 3620,3940 3780,4100 3770,4110 3770,4230 3770,4240 3840,4310 3850,4300 4370,4300 4520,4150 4530,4140 4530,1700 2230,1700 2250,1720 2250,4160

## Silkscreen, mask and mechanical layers (free items; w line width, h text height)
Top Overlay:
  text "OUT5" at 3260,1940 h30 r90
  text "OUT4" at 3360,1940 h30 r90
  text "OUT3" at 3460,1940 h30 r90
  text "OUT2" at 3560,1940 h30 r90
  text "OUT1" at 3660,1940 h30 r90
Mechanical 1:
  lines w5: 3031.5,4330.71 3110.24,4251.97 3110.24,4094.49 3228.35,3976.38 3582.68,3976.38 3700.79,4094.49 3700.79,4251.97 3779.53,4330.71 4330.71,4330.71 cw(c4330.71,4094.49) 4566.93,4094.49 4566.93,1653.54 2204.72,1653.54 2204.72,4094.49 cw(c2440.94,4094.49) 2440.94,4330.71 3031.5,4330.71 ; 3031.5,4330.71 3031.5,4330.71 ; 3310,2047.24 3500,2047.24 3500,3661.42 3310,3661.42 3310,2047.24